# Altium PCB PCB2.PcbDoc
Units mm, origin at the board's own origin, x right, y up, seen from the top; angles counter-clockwise.
Board outline 44.72 x 22 mm, 2 copper layers (Top Layer, Bottom Layer); 12 components, 8 nets, 39 pads, 32 vias.
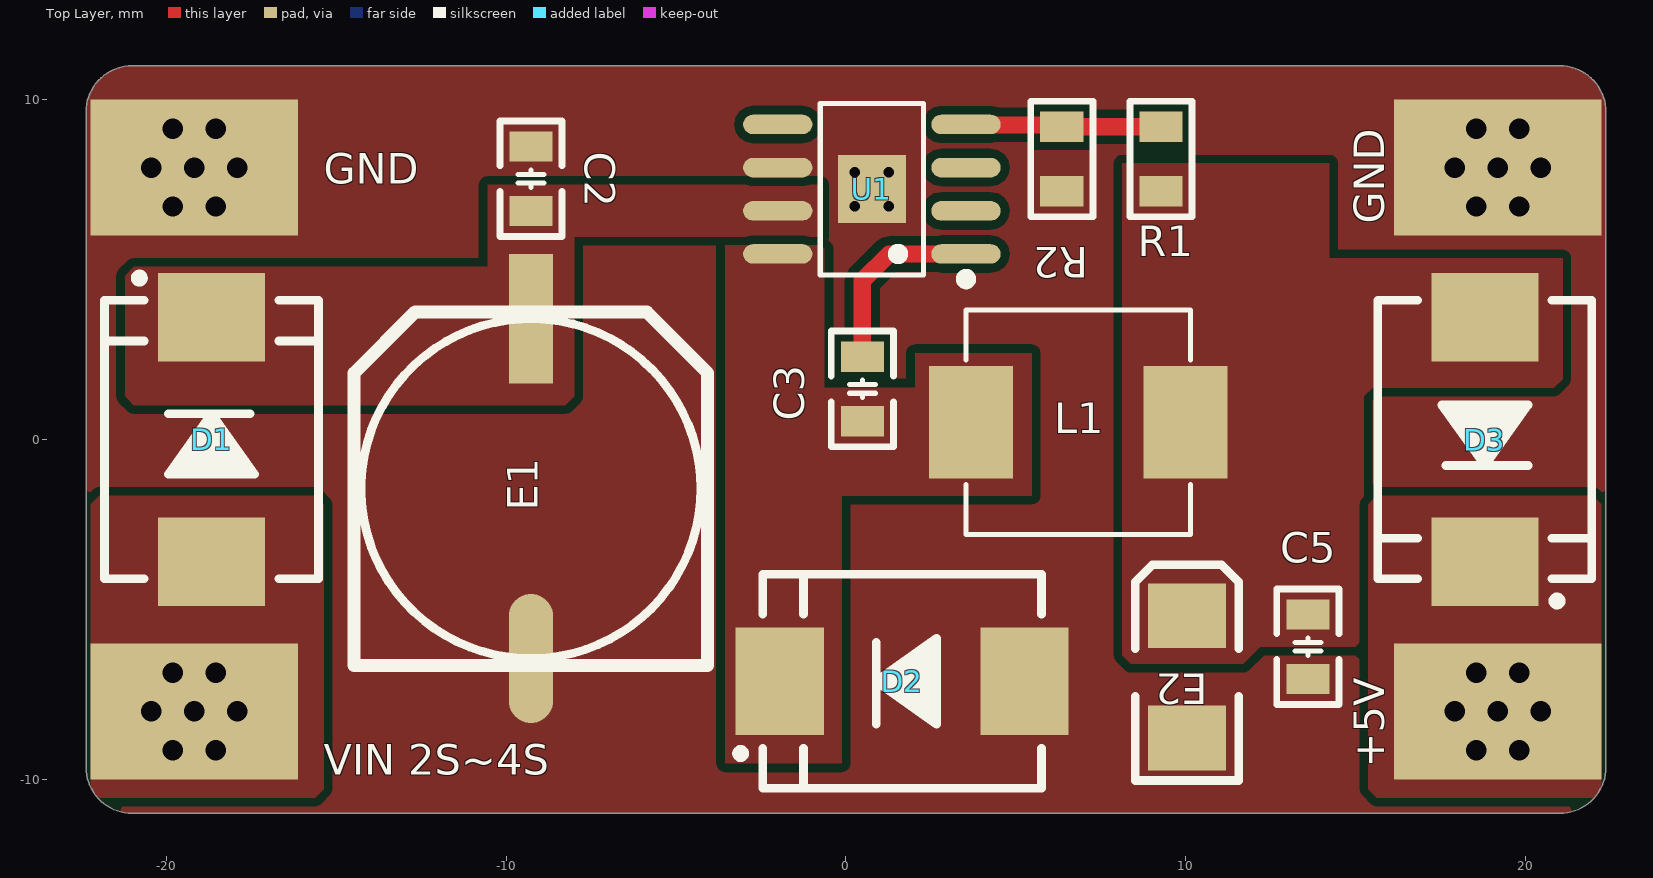
[diagram p0: Top Layer view]
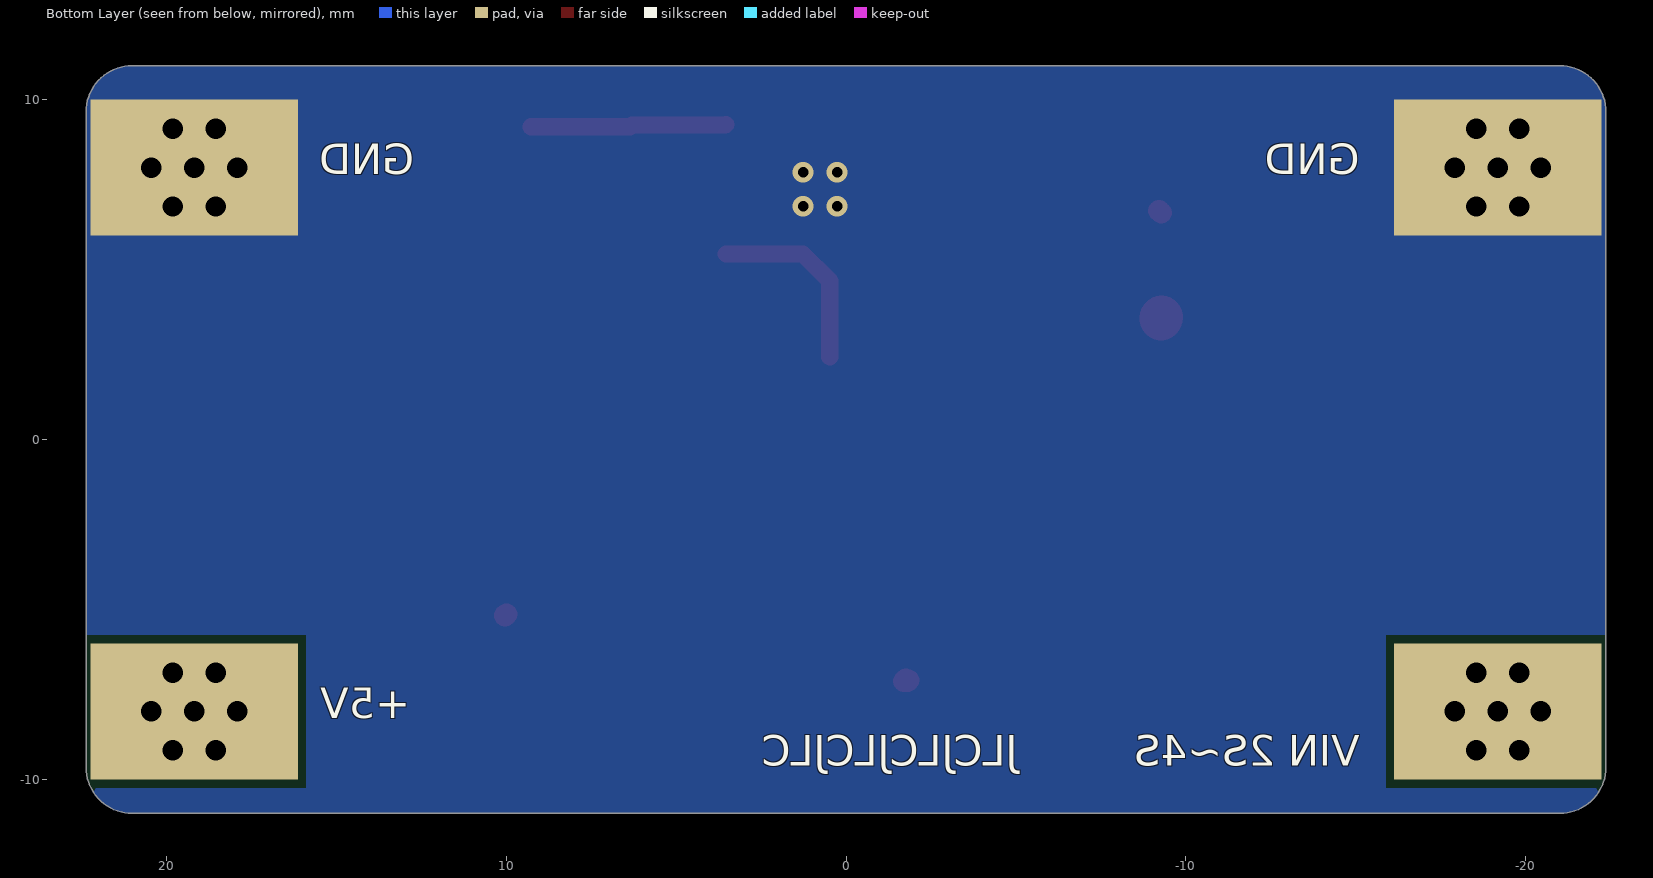
[diagram p1: Bottom Layer view, seen from below]
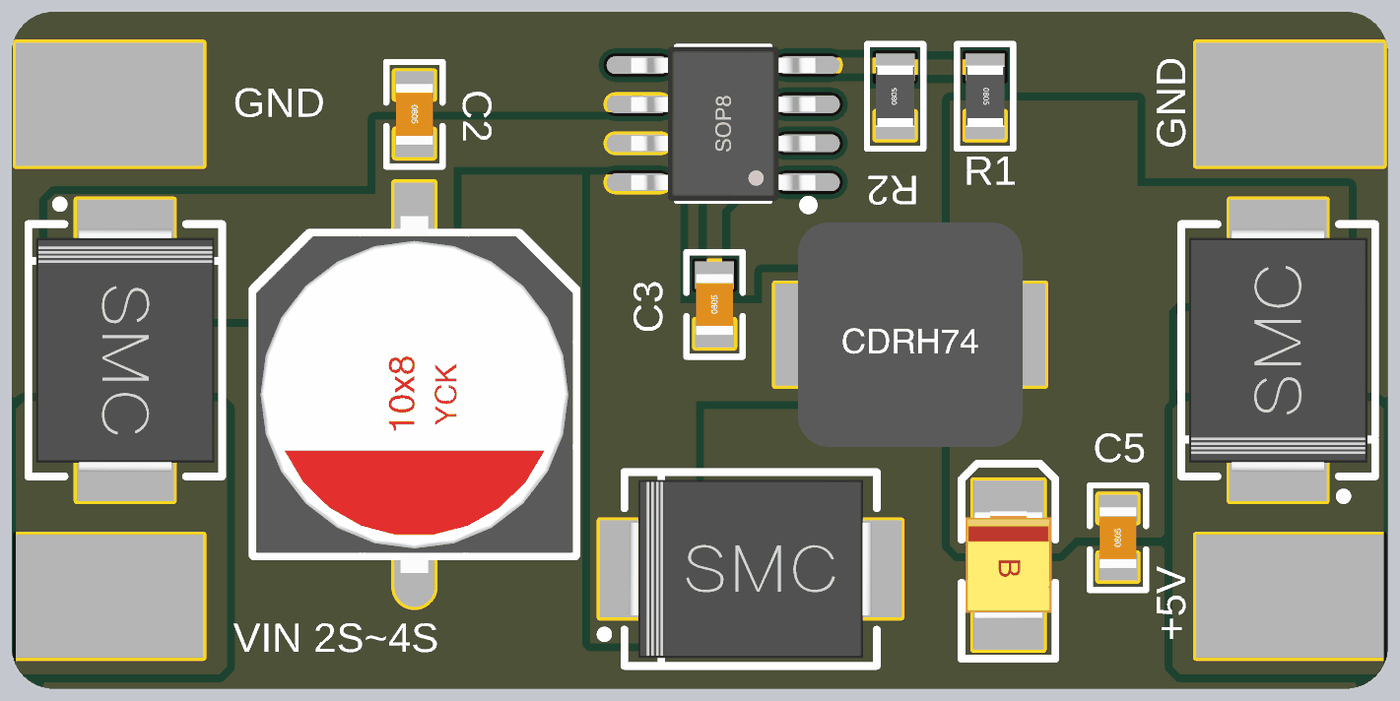
[diagram p2: 3D render of the assembled board from above, using the file's embedded part models]

## Layer stack, top to bottom
Top Solder: solder mask 0.0102, Solder Resist, Dk 3.5
Top Layer: signal copper 0.0356
Dielectric 1: dielectric 0.32, FR-4, Dk 4.8
Bottom Layer: signal copper 0.0356
Bottom Solder: solder mask 0.0102, Solder Resist, Dk 3.5

## Board outline
-22.36,-9.64 ccw(c-21,-9.64) -21,-11 21,-11 ccw(c21,-9.64) 22.36,-9.64 22.36,9.64 ccw(c21,9.64) 21,11 -21,11 ccw(c-21,9.64) -22.36,9.64

## Design rules (kind name [scope] priority, off if disabled: settings)
Clearance [All] p1: gap=0.254 ignorepadtopadclearanceinfootprint=FALSE except(0: Arc-Hole Track-Hole SMDPad-Hole THPad-Hole Via-Hole Fill-Hole Poly-Hole Region-Hole Text-Hole)
MinimumSolderMaskSliver [All] p1: minsoldermaskwidth=0
PolygonConnect [All] p1: connectstyle=Direct reliefconductorwidth=0.254 reliefentries=4 polygonreliefangle="90 Angle" airgapwidth=0.254
RoutingVias [All] p1: holewidth=0.711 width=1.27 viastyle="Through Hole" minholewidth=0.711 minwidth=1.27 maxholewidth=0.711 maxwidth=1.27
SilkToSilkClearance [All] p1: silktosilkclearance=0
SilkToSolderMaskClearance [IsPad] p1: minsilkscreentomaskgap=0 clearancetoexposedcopper=TRUE
SolderMaskExpansion [All] p1: expansion=0.102 istentingtop=FALSE
Width [All] p1: maxlimit=1.27 minlimit=0.254 preferedwidth=0.254
27 further rules are at their usual default settings.

## Components (designator, comment, footprint, x,y, rotation, side; value= is the part's Value field where it differs from the comment)
C2 "0.1uF" "C 0805_L" -9.271,7.674 r270 top
C3 "10nF" "C 0805_L" 0.481,1.489 r90 top
C5 "0.1uF" "C 0805_L" 13.589,-6.096 r90 top
D1 "SS34" SMC -18.669,0 r90 top
D2 "SS34" SMC 1.651,-7.112 r180 top
D3 "SS34" SMC 18.796,0 r270 top
E1 "10uF/10V" "CT 10*8 - R" -9.271,-1.444 r90 top
E2 "100uF/16V" "CD B(3528)" 10.033,-6.985 r270 top
L1 "22uH ±20% 3A 130mΩ" "22uH ±20% 3A 130mΩ" 6.836,0.508 r180 top
R1 "10k" "R 0805_L" 9.271,8.255 r270 top
R2 "3.24K" "R 0805_L" 6.35,8.255 r90 top
U1 "TPS5430" TPS5430 0.762,7.366 r90 top

## Footprints (in the part's own frame and the unit in brackets; to place one, negate y for a bottom-side part, rotate by r counter-clockwise, add the part's x,y. Pads: shape width x height; smd on the part's side, far side on the other; paste and mask are expansions set on the pad)
"22uH ±20% 3A 130mΩ" [mm]
  rect 2.474x3.32 smd: 1(3.153,0) 2(-3.153,0)
  silkscreen extent -3.3,-3.3 3.3,3.3, body extent -3.65,-3.65 3.65,3.65, height 4.5
"C 0805_L" [mil] "无极性贴片电容"
  rect 35x50 smd: 1(-37.4,0) 2(37.4,0)
  silkscreen extent -67,-36 67,36, body extent -39,-24 39,24, height 20
"CD B(3528)" [mil] "长3.5mm，宽2.8mm，厚1.9mm"
  rect 75x90 smd: 1(-70.87,-0.01) 2(70.86,-0.01)
  silkscreen extent -130,-60 120,60, body extent -69,-55 69,55, height 75
"CT 10*8 - R" [mm] "直径10mm，高8mm"
  rect 3.8x1.3 smd: 1(5,0)
  oval 3.8x1.3 smd: 2(-5,0)
  silkscreen extent -5.2,-5.2 5.2,5.2, body extent -5.8,-5.15 5.8,5.15, height 8
"R 0805_L" [mil] "1/8W贴片电阻"
  rect 35x50 smd: 1(-37.4,0) 2(37.4,0)
  silkscreen extent -67,-36 67,36, body extent -39,-25 39,25, height 20
SMC [mm] "7.1x5.9*2.3mm（长宽高，不包括引脚）"
  rect 2.6x3.15 smd: 1(-3.6,0) 2(3.6,0)
  silkscreen extent -4.1,-3.15 4.87,3.15, body extent -3.95,-2.9 3.95,2.9, height 2.45
TPS5430 [mm]
  oval 0.574x2.038 smd: 1(-1.905,-2.769) 2(-0.635,-2.769) 3(0.635,-2.769) 4(1.905,-2.769) 5(1.905,2.769) 6(0.635,2.769) 7(-0.635,2.769) 8(-1.905,2.769)
  rect 2x2 smd: 9(0,0)
  silkscreen extent -2.79,-2.92 2.53,1.52, body extent -2.5,-3 2.5,3, height 1.9

## Part data
C2 C3 C5: library part C, "无极性贴片电容", BOM名称=无极性贴片电容, 学习资源=www.ooocke.com, 版权归属=源创客
D1 D2 D3: "肖特基二极管", BOM名称=肖特基二极管, 学习资源=www.ooocke.com, 属性=40V/3A, 版权归属=源创客
E1: library part C-CT, "贴片固态电容", BOM名称=贴片固态电容, 学习资源=www.ooocke.com, 版权归属=源创客
E2: library part C-CD, "贴片钽电容", BOM名称=贴片钽电容, 学习资源=www.ooocke.com, 版权归属=源创客
L1: library part L-CD, "贴片功率电感", BOM名称=功率电感, 学习资源=www.ooocke.com, 版权归属=源创客
R1 R2: library part R, "贴片电阻", BOM名称=贴片电阻, 学习资源=www.ooocke.com, 版权归属=源创客
U1: "LC_C9864"

## Free pads (board coordinates)
  rect 6.096x4 smd: 25(-19.177,-8) 25(-19.177,8) 25(19.177,-8) 25(19.177,8)
  rect 6.096x4 smd far side: 25(-19.177,-8) 25(-19.177,8) 25(19.177,-8) 25(19.177,8)

## Via types
v1: diameter 1, hole 0.6, Top Layer to Bottom Layer, tented both sides, 28 vias
v2: diameter 0.61, hole 0.305, Top Layer to Bottom Layer, 4 vias

## Nets (pads, with @x,y where several pads share a name; then routed paths per layer and width w, separated by ;. In a path a pad name is that pad's centre, name@x,y a point inside that pad or via, vN(x,y) a via of type N, cw(c..) or ccw(c..) an arc to the next point about the centre after c; other vN are vias at no path point)
+5V: D3.2 pad.25@19.177,-8
  other v1: 18.542,-9.143 19.812,-9.143 17.907,-8 19.177,-8 20.447,-8 18.542,-6.857 19.812,-6.857
GND: C2.1 C5.1 D2.1 E1.2 E2.2 pad.25@19.177,8 pad.25@-19.177,8 R2.1 U1.6 U1.9
  other v1: -19.812,6.857 -18.542,6.857 18.542,6.857 19.812,6.857 -20.447,8 -19.177,8 -17.907,8 17.907,8 19.177,8 20.447,8 -19.812,9.143 -18.542,9.143 18.542,9.143 19.812,9.143
  other v2: 0.262,6.866 1.262,6.866 0.262,7.866 1.262,7.866
NetC3_1: C3.1 D2.2 L1.1 U1.8 | length 0.1
  Top Layer w0.635: D2.2@-1.847,-7.087 -1.822,-7.112 D2.2@-1.761,-7.051 ; D2.2@-1.712,-7.095 D2.2@-1.695,-7.112
NetC3_2: C3.2 U1.1 | length 5.6
  Top Layer w0.508: C3.2 0.481,4.672 1.27,5.461 U1.1
NetC5_2: C5.2 D3.1 E2.1 L1.2 R1.2 | length 0.1
  Top Layer w0.635: E2.1@9.989,-5.141 E2.1 E2.1@10.046,-5.172
NetR1_1: R1.1 R2.2 U1.4 | length 5.8
  Top Layer w0.508: U1.4 3.544,9.258 6.297,9.258 R2.2 R1.1
VCC_2S-4S: D1.1 pad.25@-19.177,-8
  other v1: -19.812,-9.143 -18.542,-9.143 -20.447,-8 -19.177,-8 -17.907,-8 -19.812,-6.857 -18.542,-6.857
VCC_IN: C2.2 D1.2 E1.1 U1.7 | length 0.1
  Top Layer w0.635: C2.2@-9.271,6.67 C2.2@-9.21,6.731
  Top Layer w1.27: E1.1@-9.286,3.6 -9.271,3.585 E1.1
pads on no net: U1.2 U1.3 U1.5

## Polygon pours and split planes (outlines as drawn)
GND on Top Layer "GND_L01_P021" (solid, pour order 21): -22.36,-9.64 ccw(c-21,-9.64) -21,-11 21,-11 ccw(c21,-9.64) 22.36,-9.64 22.36,9.64 ccw(c21,9.64) 21,11 -21,11 ccw(c-21,9.64) -22.36,9.64
NetC3_1 on Top Layer "NETC3_1" (solid, pour order 20): -3.556,6.096 -0.635,6.096 -0.635,1.524 2.032,1.524 2.032,2.54 5.461,2.54 5.461,-1.651 -0.127,-1.651 -0.127,-9.525 -3.556,-9.525
VCC_IN on Top Layer "VCC_IN_L01_P017" (solid, pour order 17): -10.541,5.969 -0.762,5.969 -0.762,7.493 -10.541,7.493
NetC5_2 on Top Layer "NETC5_2_L01_P015" (solid, pour order 15): 8.128,8.128 14.224,8.128 14.224,5.334 21.082,5.334 21.082,1.778 20.828,1.524 15.494,1.524 15.24,1.27 15.24,-5.842 14.986,-6.096 12.192,-6.096 11.684,-6.604 8.382,-6.604 8.128,-6.35 8.128,-5.588
VCC_IN on Top Layer "VCC_IN_L01_P008" (solid, pour order 8): -21.209,4.826 -20.955,5.08 -8.255,5.08 -8.001,4.826 -8.001,1.27 -8.255,1.016 -20.955,1.016 -21.209,1.27
VCC_IN on Top Layer "VCC_IN_L01_P007" (solid, pour order 7): -10.541,7.239 -10.287,7.493 -8.128,7.493 -8.001,7.366 -8.001,1.27 -8.255,1.016 -10.287,1.016 -10.541,1.27
+5V on Top Layer "+5V_L01_P001" (solid, pour order 1): 15.621,-10.541 15.367,-10.287 15.367,-1.905 15.621,-1.651 21.971,-1.651 22.225,-1.905 22.225,-10.287 21.971,-10.541
VCC_2S-4S on Top Layer "VCC_2S-4S_L01_P000" (solid, pour order 0): -15.621,-10.541 -15.367,-10.287 -15.367,-1.905 -15.621,-1.651 -21.971,-1.651 -22.225,-1.905 -22.225,-10.287 -21.971,-10.541
GND on Bottom Layer "GND_L02_P019" (solid, pour order 19): -22.36,-9.64 ccw(c-21,-9.64) -21,-11 21,-11 ccw(c21,-9.64) 22.36,-9.64 22.36,9.64 ccw(c21,9.64) 21,11 -21,11 ccw(c-21,9.64) -22.36,9.64

## Silkscreen, mask and mechanical layers (free items; w line width, h text height)
Top Overlay:
  text "GND" at -15.367,7.239 h1.52
  text "GND" at 16.129,6.35 h1.52 r90
  text "+5V" at 16.129,-9.652 h1.52 r90
  text "VIN 2S~4S" at -15.367,-10.16 h1.52
Bottom Overlay:
  text "GND" at -15.113,7.509 h1.52
  text "GND" at 12.7,7.509 h1.52
  text "+5V" at 12.827,-8.493 h1.52
  text "VIN 2S~4S" at -15.112,-9.89 h1.52
  text "JLCJLCJLCJLC" at -5.056,-9.89 h1.52
Mechanical 1:
  the board outline again, w0.254